# Altium PCB controller.PcbDoc
Units mil, origin at the board's own origin, x right, y up, seen from the top; angles counter-clockwise.
Board outline 795 x 1625 mil, 2 copper layers (Top Layer, Bottom Layer); 33 components, 30 nets, 134 pads, 35 vias.
Unrouted connection lines stored in the file: 6.
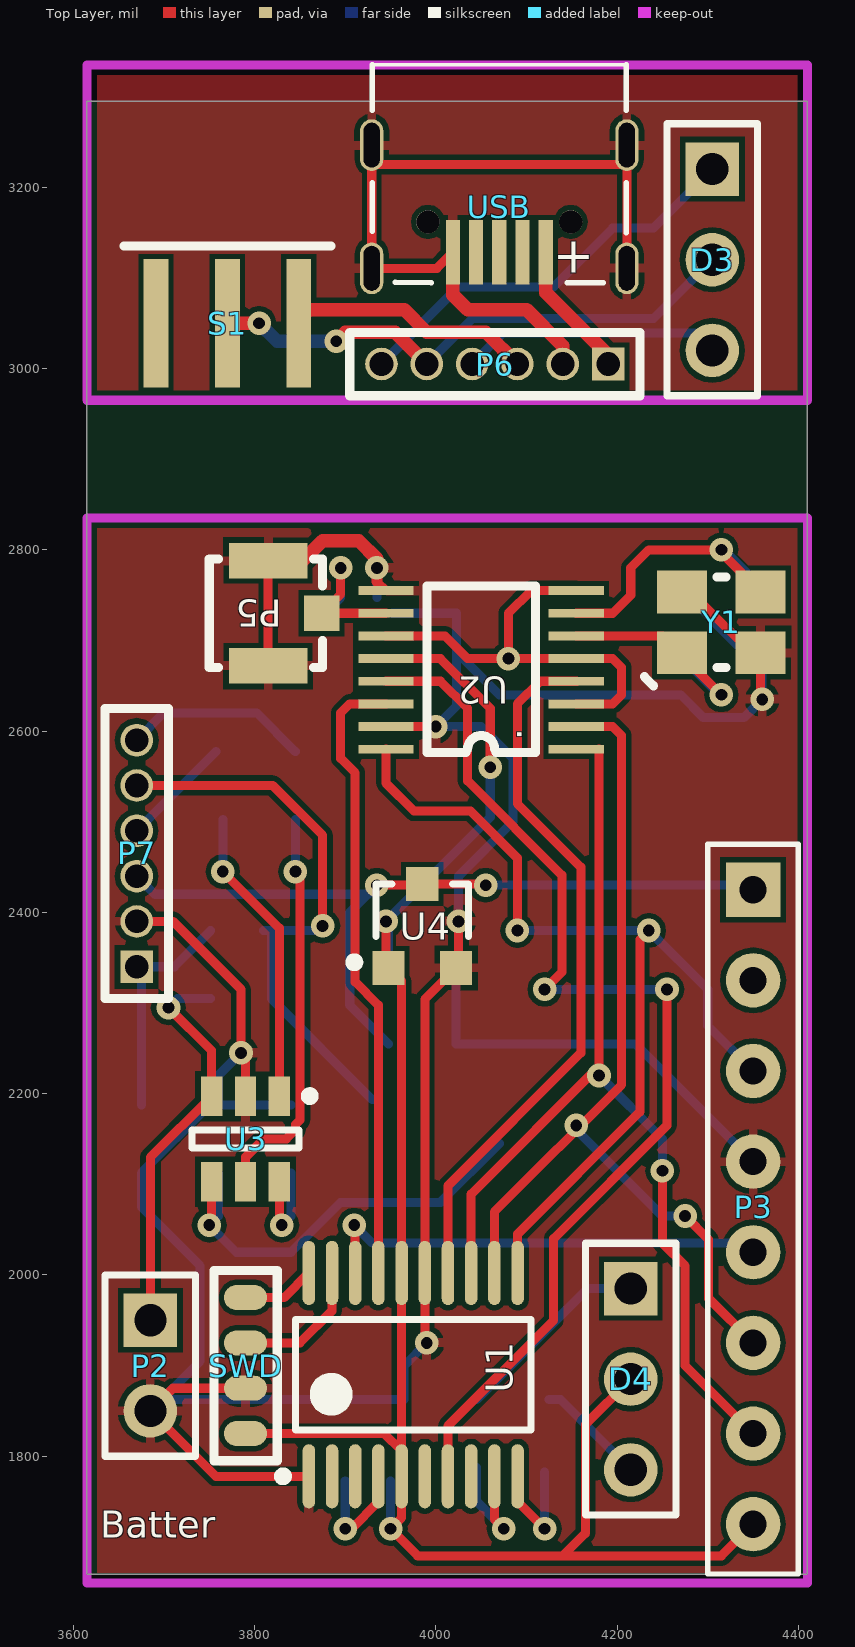
[diagram p0: Top Layer view]
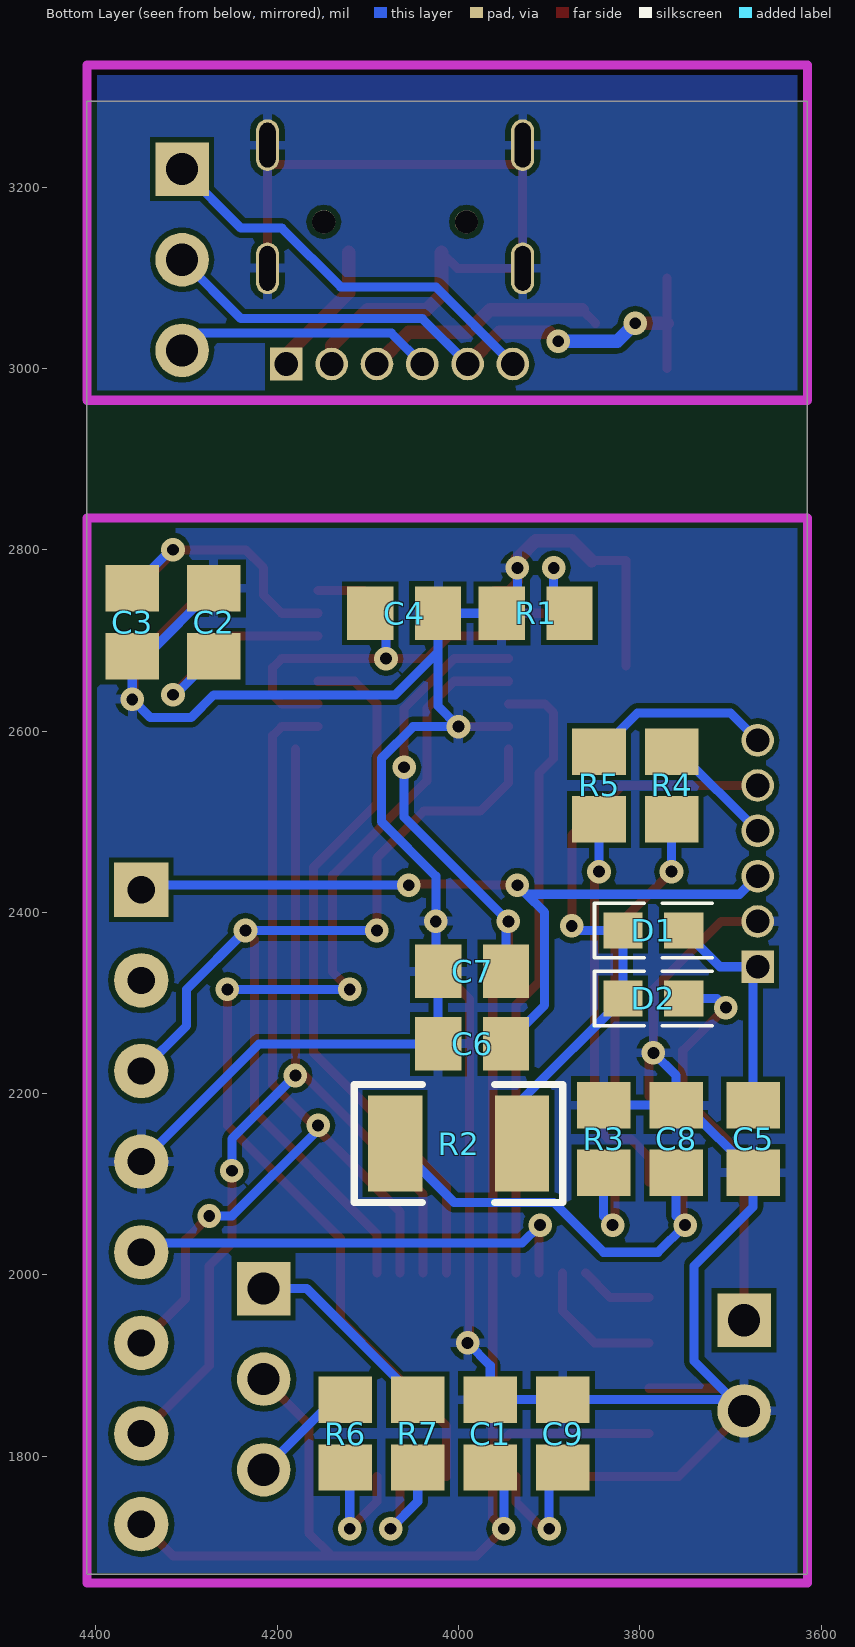
[diagram p1: Bottom Layer view, seen from below]

## Layer stack, top to bottom
Top Layer: signal copper 1.4
Dielectric: dielectric 12.6, FR-4, Dk 4.8
Bottom Layer: signal copper 1.4

## Board outline
3615,3295 3615,1670 4410,1670 4410,3295

## Design rules (kind name [scope] priority, off if disabled: settings)
Clearance [All] p1: gap=6
PolygonConnect [All] p1: connectstyle=Relief reliefconductorwidth=10 reliefentries=4 polygonreliefangle="90 Angle"
RoutingVias [All] p1: holewidth=28 width=50 viastyle="Through Hole" minholewidth=28 minwidth=50 maxholewidth=28 maxwidth=50
SilkscreenOverComponentPads [All] p1: minsilkscreentomaskgap=10
SolderMaskExpansion [All] p1: expansion=4
Width [All] p1: maxlimit=50 minlimit=10 preferedwidth=10 minimp=50.000000 maximp=50.000000 favimp=50.000000
27 further rules are at their usual default settings.

## Components (designator, comment, footprint, x,y, rotation, side; value= is the part's Value field where it differs from the comment)
C1 "Cap" 0805-2 3965,1825 r90 bottom
C2 "Cap" 0805-2 4270,2720 r270 bottom
C3 "Cap" 0805-2 4360,2720 r90 bottom
C4 "Cap" 0805-2 4060,2730 r0 bottom
C5 "Cap" 0805-2 3675,2150 r270 bottom
C6 "Cap" 0805-2 3985,2255 r0 bottom
C7 "Cap" 0805-2 3985,2335 r0 bottom
C8 "Cap" 0805-2 3760,2150 r90 bottom
C9 "Cap" 0805-2 3885,1825 r90 bottom
D1 "S4" SOD523 3785,2380 r0 bottom
D2 "S4" SOD523 3785,2305 r0 bottom
D3 "LED1" HDR3X1_A 4305,3220 r270 top
D4 "LED1" HDR3X1_A 4215,1985 r270 top
P2 "Batter" HDR1X2 3685,1950 r270 top
P3 "PS2_Controller" HDR8X1_A 4350,2025 r270 top
P5 "IPEX" U.FL-R-SMT 3815,2730 r90 top
P6 "Header 6" HDR6*1*1.27 4065,3005 r180 top
P7 "Header 6" HDR6*1*1.27 3670,2465 r90 top
R1 "Res1" 0805-2 3915,2730 r180 bottom
R2 "Res1" 1210 4000,2145 r180 bottom
R3 "Res1" 0805-2 3840,2150 r270 bottom
R4 "Res1" 0805-2 3765,2540 r90 bottom
R5 "Res1" 0805-2 3845,2540 r90 bottom
R6 "Res1" 0805-2 4125,1825 r90 bottom
R7 "Res1" 0805-2 4045,1825 r90 bottom
S1 "SW-SPDT" SWITCH_A4 3770,3135 r0 top
SWD "Header 4" HDR4X1X1.27 3790,1900 r90 top
U1 "STM32F030F4P6" STM-TSSOP20_N 3975,1890 r90 top
U2 "LT8920" "SSOP-16 LT8920" 4050,2670 r90 top
U3 "TP4057" SOT23-6 3790,2150 r270 top
U4 "662K" SOT-23 3985,2385 r0 top
USB "microusb" MICROUSB_1 4070,3335 r180 top
Y1 "12M" XTAL_3225 4315,2720 r0 top

## Footprints (in the part's own frame and the unit in brackets; to place one, negate y for a bottom-side part, rotate by r counter-clockwise, add the part's x,y. Pads: shape width x height; smd on the part's side, far side on the other; paste and mask are expansions set on the pad)
0805-2 [mm]
  rect 1.3x1.5 smd: 1(-0.95,0) 2(0.95,0)
1210 [mil]
  rect 60x106.3 smd: 1(-70,0) 2(70,0)
  silkscreen extent -115,-65 115,65, body extent -65,-50 65,50, height 39
HDR1X2 [mm] "Connector; Header; 2 Position"
  rect 1.5x1.5 hole 0.9: 1(0,0)
  round 1.5 hole 0.9: 2(2.54,0)
  silkscreen extent -1.27,-1.27 3.81,1.27
HDR3X1_A [mm] "Connector; Header; 3 Posi"
  rect 1.5x1.5 hole 0.9: 1(0,0)
  round 1.5 hole 0.9: 2(2.54,0) 3(5.08,0)
  silkscreen extent -1.27,-1.27 6.35,1.27
HDR4X1X1.27 [mm]
  oval 0.7x1.2 smd: 1(-1.905,0) 2(-0.635,0) 3(0.635,0) 4(1.905,0)
  silkscreen extent -2.67,-0.89 2.67,0.89
HDR6*1*1.27 [mil]
  rect 36x36 hole 26: 1(-125,0)
  round 36 hole 26: 2(-75,0) 3(-25,0) 4(25,0) 5(75,0) 6(125,0)
  silkscreen extent -160,-35 160,35
HDR8X1_A [mil] "2.54mm"
  rect 60x60 hole 30: 1(-400,0)
  round 60 hole 30: 2(-300,0) 3(-200,0) 4(-100,0) 5(0,0) 6(100,0) 7(200,0) 8(300,0)
  silkscreen extent -450,-50 355,50
MICROUSB_1 [mm] "5P母座"
  rect 0.4x1.8 smd: 1(-1.3,5.25) 2(-0.65,5.25) 3(0,5.25) 4(0.65,5.25) 5(1.3,5.25)
  oval 0.65x1.45 hole 0.45 slot 1.25 at 90 deg: 6(-3.575,5.7) 6(-3.575,2.25) 6(3.575,5.7) 6(3.575,2.25)
  round 0.65 hole 0.65 unplated: ""(-2,4.4) ""(2,4.4)
  silkscreen extent -3.56,0 3.56,6.1
SOD523 [mm] "D1N5819_0603封?"
  rect 1.1x1 smd: 1(-0.85,0) 2(0.85,0)
  silkscreen extent -1.65,-0.76 1.65,0.76, body extent -1.14,-0.38 1.14,0.38, height 1
SOT23-6 [mm] "Max"
  rect 1.1x0.6 smd: 1(-1.2,0.95) 2(-1.2,0) 3(-1.2,-0.95) 4(1.2,-0.95) 5(1.2,0) 6(1.2,0.95)
  silkscreen extent -1.32,-1.5 0.25,1.93, body extent -0.87,-1.5 0.87,1.5, height 1.45
SOT-23 [mm]
  rect 0.9x0.95 smd: 1(-0.95,-1.175) 2(0.95,-1.175) 3(0,1.175)
  silkscreen extent -2.03,-1.14 1.3,1.18
"SSOP-16 LT8920" [mil]
  rect 9.84x61.02 smd: 1(-90,-105) 2(-65,-105) 3(-40,-105) 4(-15,-105) 5(10,-105) 6(35,-105) 7(60,-105) 8(85,-105) 9(85,105) 10(60,105) 11(35,105) 12(10,105) 13(-15,105) 14(-40,105) 15(-65,105) 16(-90,105)
  silkscreen extent -93,-60 90,60
STM-TSSOP20_N [mm] "SOP, 20-Leads, Body 6.6x4.5mm, Pitch 0.65mm, IPC Medium Density"
  oval 1.8x0.35 smd: 1(-2.85,2.925) 2(-2.85,2.275) 3(-2.85,1.625) 4(-2.85,0.975) 5(-2.85,0.325) 6(-2.85,-0.325) 7(-2.85,-0.975) 8(-2.85,-1.625) 9(-2.85,-2.275) 10(-2.85,-2.925) 11(2.85,-2.925) 12(2.85,-2.275) 13(2.85,-1.625) 14(2.85,-0.975) 15(2.85,-0.325) 16(2.85,0.325) 17(2.85,0.975) 18(2.85,1.625) 19(2.85,2.275) 20(2.85,2.925)
  silkscreen extent -2.97,-3.3 1.55,3.77, body extent -2.25,-3.3 2.25,3.3, height 1.2
SWITCH_A4 [mm] "5.8*5.8m"
  rect 0.7x3.6 smd: 1(-2,-2.159) 2(0,-2.159) 3(2,-2.159)
  silkscreen extent -2.9,0 2.9,0
U.FL-R-SMT [mm] "IPEX插?"
  rect 1x1 smd: 1(0,-1.5)
  rect 1x2.2 smd: 2(-1.475,0) 3(1.475,0)
  silkscreen extent -1.52,-1.52 1.52,1.65
XTAL_3225 [mm]
  rect 1.4x1.2 smd: 1(-1.1,-0.85) 2(1.1,-0.85) 3(1.1,0.85) 4(-1.1,0.85)
  silkscreen extent -2.16,-1.78 0.13,1.27

## Part data
C1 C2 C3 C4 C5 C6 C7 C8 C9: "ÎÞ¼"
D1 D2: library part Diode, "Default Diode"
D3 D4: "˫ɫLED"
P2: library part "Header 2", "Header, 2-Pin"
P5: "U.FL-R-SMT"
P6 P7: "接?"
R1 R2 R3 R4 R5 R6 R7: "ÌùÆ"
S1: "开关"
SWD: "接插件"
U1: "ARM Cortex-M0 32-bit MCU, 16 KB Flash, 4 KB Internal RAM, 15 I/Os, 20-pin TSSOP, -40 to 85 degC, Tube"
U3: "l锂电?"
Y1: library part XTAL-4PIN, "贴片?"

## Via types
v1: diameter 25.98, hole 12.99, Top Layer to Bottom Layer, tented both sides, 35 vias

## Nets (pads, with @x,y where several pads share a name; then routed paths per layer and width w, separated by ;. In a path a pad name is that pad's centre, name@x,y a point inside that pad or via, vN(x,y) a via of type N, cw(c..) or ccw(c..) an arc to the next point about the centre after c; other vN are vias at no path point)
3V3: C1.1 C7.1 D4.2 P3.8 SWD.1 U1.5 U1.16 U2.12 U4.1 | length 2037
  Top Layer w10: SWD.1 3943.25,1825 U1.5@3962.2,1806.05 ; U4.1@3945,2341.34 v1(3945,2390) ; U2.12 4005,2680 4060,2625 v1(4060,2560) ; U4.1 3962.2,2324.13 U1.16 U1.5@3962.2,1806.05 ; D4.2 4165,1835 4165,1715 4140,1690 ; P3.8 4315,1690 4140,1690 ; U1.5@3962.2,1806.05 U1.5 3962.2,1732.2 v1(3950,1720) 3980,1690 4140,1690
  Bottom Layer w10: v1(3945,2390) 4060,2505 v1(4060,2560) ; C7.1 v1@3947.6,2387.4 ; v1(3950,1720) C1.1@3950,1772.6
5V: D1.2 D2.2 D3.2 P6.5 P7.5 R2.2 S1.2 | length 1337.1
  Top Layer w10: P7.5 3820,2540 3875,2485 v1(3875,2385) ; S1.2@3770,3000 S1.2 S1.2@3770,3100
  Top Layer w15: S1.2 v1(3805,3050) ; v1(3890,3030) 3900,3040 3955,3040 P6.5
  Bottom Layer w10: D1.2@3810,2380 D1.2 ; v1(3875,2385) 3870,2380 D1.2 ; R2.2@3930,2193.46 D2.2 D1.2 ; P6.5 4040,3055 4240,3055 D3.2
  Bottom Layer w15: v1(3805,3050) 3825,3030 v1(3890,3030)
ANT: P5.1 R1.2 U2.10 | length 186.8
  Top Layer w10: v1(3895,2780) 3895,2750.94 P5.1 U2.10
  Bottom Layer w10: R1.2 3895,2747.4 v1(3895,2780)
BAT+: D2.1 P2.1 U3.3 | length 443.4
  Top Layer w10: P2.1 3685,2129.65 U3.3 3752.6,2247.4 v1(3705,2295)
  Bottom Layer w10: v1(3705,2295) 3715,2305 D2.1
D3_1: D3.3 P6.4 P7.4 R4.2 | length 410.6
  Bottom Layer w10: P7.4 R4.2@3757.4,2577.4 ; P6.4 4074,3039 4286,3039 D3.3
D3_3: D3.1 P6.6 P7.6 R5.2 | length 659.1
  Bottom Layer w10: P7.6 3700,2620 3802.4,2620 R5.2 ; P6.6 4025,3090 4130,3090 4195,3155 4240,3155 D3.1
GND: C1.2 C2.1 C3.1 C4.1 C5.2 C6.2 C7.2 C8.2 C9.2 P2.2 P3.4 P5.2 P5.3 P6.2 P7.2 R1.1 R3.1 SWD.2 U1.1 U1.15 U2.9 U2.15 U3.2 U4.2 USB.5 USB.6 Y1.2 Y1.4 | length 4927.9
  Top Layer w10: P7.2 3710,2390 3785,2315 v1(3785,2245) 3790,2240 U3.2 ; SWD.2 3710,1875 P2.2 3757.2,1777.8 U1.1 ; P5.2 P5.3 P5.3@3853.07,2788.07 ; 3935,2765 U2.9 U2.9@3960,2755 ; U2.15 v1(4000,2605) ; v1@3987.8,1927.2 U1.15 3987.8,2304.13 U4.2 ; USB.5 4001.1,3110.59 3929.25,3110.59 3929.25,3225 4210.75,3225 USB.6@4210.75,3110.59 ; U4.2@4025,2341.34 v1(4025,2390) ; Y1.4@4286.38,2748.46 Y1.2@4353.31,2681.54 ; v1@4358.31,2636.69 Y1.2
  Top Layer w12: 3935,2765 v1(3935,2780)
  Top Layer w15: P5.3@3853.07,2788.07 3875,2810 3915,2810 3935,2790 v1(3935,2780) ; USB.5 4018.82,3081.18 4035,3065 4100,3065 4140,3025 P6.2
  Bottom Layer w10: v1(3785,2245) 3760,2220 C8.2 ; R3.1 C8.2 ; R1.1@3935,2747.4 v1(3935,2780) ; R1.1 C4.1 ; v1(3990,1925) 3965,1900 C1.2 C9.2 3697.4,1862.4 3740,1905 3740,2010 3675,2075 C5.2 3749.8,2187.4 C8.2 ; C7.2 C6.2 4220,2255 P3.4 ; C7.2@4025,2337.6 v1(4025,2390) 4025,2440 4085,2500 4085,2570 4050,2605 v1(4000,2605) 4022.6,2627.6 C4.1 ; C2.1 4344.8,2682.6 C3.1 v1(4360,2635) 4340,2615 4295,2615 4270,2640 4070,2640 4022.6,2687.4 C4.1
LED1: R6.1 U1.10 | length 132.8
  Top Layer w10: U1.10 4090.16,1749.84 v1(4120,1720)
  Bottom Layer w10: v1(4120,1720) R6.1@4120,1782.6
LED2: R7.1 U1.9 | length 142.1
  Top Layer w10: U1.9 4064.57,1730.43 v1(4075,1720)
  Bottom Layer w10: R7.1 4045,1750 v1(4075,1720)
LED_CHG: R4.1 U3.1 | length 331.2
  Top Layer w10: v1(3765,2445) 3827.4,2382.6 U3.1
  Bottom Layer w10: v1(3765,2445) R4.1
LED_STD: R5.1 U3.5 | length 441.6
  Top Layer w10: U3.5 3790,2130 3810,2150 3835,2150 3845,2160 3845,2165.82 3850.21,2171.03 3850.21,2439.79 v1(3845,2445)
  Bottom Layer w10: v1(3845,2445) R5.1
LT8920_CS: U1.17 U2.14 | length 689.2
  Top Layer w10: U1.17 3936.61,2297.75 3911.01,2323.36 3911.01,2553.99 3895,2570 3895,2620 3905,2630 U2.14
LT8920_PKT: U1.7 U2.13 | length 1235.7
  Top Layer w10: U2.13 4005,2655 4035,2625 4035,2545 4138.99,2441.01 4138.99,2333.99 v1(4120,2315) ; U1.7 4013.39,1833.39 4130,1950 4130,2040 4255,2165 v1(4255,2315)
  Bottom Layer w10: v1(4120,2315) v1(4255,2315)
LT8920_RST: U1.14 U2.4 | length 792.9
  Top Layer w10: U1.14 4013.39,2098.39 4160,2245 4160,2450 4090,2520 4090,2630 4115,2655 U2.4
NetC2_2: C2.2 U2.6 Y1.1 | length 227.5
  Top Layer w10: U2.6 Y1.1@4250,2705 ; v1(4315,2640) Y1.1@4271.69,2683.31 ; Y1.1@4271.69,2683.31 Y1.1 4268.46,2686.54 Y1.1@4271.69,2683.31
  Bottom Layer w10: C2.2 v1@4312.6,2640
NetC3_2: C3.2 U2.7 Y1.3 | length 325.6
  Top Layer w10: U2.7 4195,2730 4215,2750 4215,2780 4235,2800 v1(4315,2800) ; v1@4316.77,2795 Y1.3
  Bottom Layer w10: v1@4317.4,2800 C3.2
NetC4_2: C4.2 U2.3 U2.5 U2.8 U2.11 | length 526.6
  Top Layer w10: U2.11 4010,2705 4035,2680 v1(4080,2680) ; U2.3 4195,2630 4205,2640 4205,2670 4195,2680 U2.5 v1(4080,2680) ; U2.8 4105,2755 4080,2730 v1(4080,2680)
  Bottom Layer w10: v1(4080,2680) C4.2@4080,2712.6
NetC8_1: C8.1 R2.1 U3.4 | length 474.9
  Top Layer w10: v1@3752.6,2057.6 U3.4
  Bottom Layer w10: v1(3750,2055) 3780,2025 3840,2025 3895,2080 4005,2080 R2.1 ; 3760,2065 C8.1
NetD4_1: D4.1 R7.2 | length 220.8
  Bottom Layer w10: R7.2 4167.6,1985 D4.1
NetD4_3: D4.3 R6.2 | length 122.1
  Bottom Layer w10: R6.2 4137.6,1862.4 D4.3
NetR3_2: R3.2 U3.6 | length 106.9
  Top Layer w10: v1@3827.4,2057.6 U3.6
  Bottom Layer w10: v1(3830,2055) 3840,2065 R3.2
NRST: C9.1 U1.4 | length 129.7
  Top Layer w10: v1(3900,1720) 3907.07,1720 3936.61,1749.54 U1.4
  Bottom Layer w10: v1(3900,1720) C9.1@3900,1772.6
PS2PAD_CS: P3.5 U1.18 | length 491.2
  Top Layer w10: U1.18 3911.02,2041.02
  Bottom Layer w10: v1(3910,2055) 3930,2035 4340,2035 P3.5
SPI_CLK: P3.3 U1.11 U2.16 | length 1082
  Top Layer w10: U2.16 3945,2542.63 3976,2511.63 4038.37,2511.63 4090,2460 v1(4090,2380) ; U1.11 4090.16,2045.16 4225,2180 4225,2370 v1(4235,2380)
  Bottom Layer w10: v1(4090,2380) v1(4235,2380) 4300,2315 4300,2275 P3.3
SPI_MISO: P3.6 U1.12 U2.2 | length 1040.5
  Top Layer w10: U1.12 4064.57,2069.57 4205,2210 4205,2595 4195,2605 U2.2 ; v1(4275,2065) 4301,2039 4301,1974 P3.6
  Bottom Layer w10: v1(4155,2165) 4155,2160 4250,2065 v1(4275,2065)
SPI_MOSI: P3.7 U1.13 U2.1 | length 1101.6
  Top Layer w10: U1.13 4038.98,2088.98 4180,2230 U2.1@4180,2580 ; v1(4250,2115) 4250,2035 4275,2010 4275,1900 P3.7
  Bottom Layer w10: v1(4180,2220) 4250,2150 v1(4250,2115)
SWCLK: SWD.4 U1.20 | length 81.1
  Top Layer w10: SWD.4 3832.64,1975 U1.20
SWIO: SWD.3 U1.19 | length 151.9
  Top Layer w10: SWD.3 3850,1925 3885.43,1960.43 U1.19
USB_V+: C5.1 D1.1 P6.1 P7.1 USB.1 | length 397.5
  Top Layer w10: P6.1 P6.1@4190,3015
  Top Layer w15: USB.1 4121.18,3083.82 P6.1@4190,3015
  Bottom Layer w10: P7.1 3711.54,2340 D1.1 ; C5.1 P7.1@3675,2335
VCC: C6.1 P3.1 P6.3 P7.3 S1.3 U4.3 | length 1148.2
  Top Layer w10: S1.3 3863.74,3065 ; v1(3935,2430) U4.3@3983.74,2430 ; U4.3 v1@4053.74,2431.26
  Top Layer w15: 3863.74,3065 3965,3065 3990,3040 4055,3040 P6.3
  Bottom Layer w10: P7.3 3690,2420 3925,2420 ; v1(3935,2430) 3925,2420 ; C6.1 3905,2297.6 3905,2400 3925,2420 ; v1(4055,2430) P3.1@4345,2430
pads on no net: P3.2 S1.1 U1.2 U1.3 U1.6 U1.8 USB. USB.2 USB.3 USB.4

## Polygon pours and split planes (outlines as drawn)
GND on Bottom Layer "Top Layer-No Net" (solid, pour order 14): 3615,3335 4410,3335 4410,2965 3620,2965 3615,2970
GND on Bottom Layer "Top Layer-No Net" (solid, pour order 12): 3615,2835 4410,2835 4410,1660 3615,1660
GND on Top Layer "Top Layer-No Net" (solid, pour order 10): 3615,2835 4410,2835 4410,1660 3615,1660
GND on Top Layer "Top Layer-No Net" (solid, pour order 8): 3615,3335 3615,2965 4410,2965 4410,3335

## Keep-outs
Keep-Out Layer:
  lines w10: 3615,1660 3615,2835 4410,2835 4410,1660 3615,1660 ; 3615,2965 4410,2965 4410,3335 3615,3335 3615,2965

## Text inside footprints (layer, text, board x,y; h text height)
USB: Top Overlay "+" at 4175,3140 h39.37 r180